# EAGLE board Microcontroller_Module_With_Power_Supply (EAGLE 9.6.2)
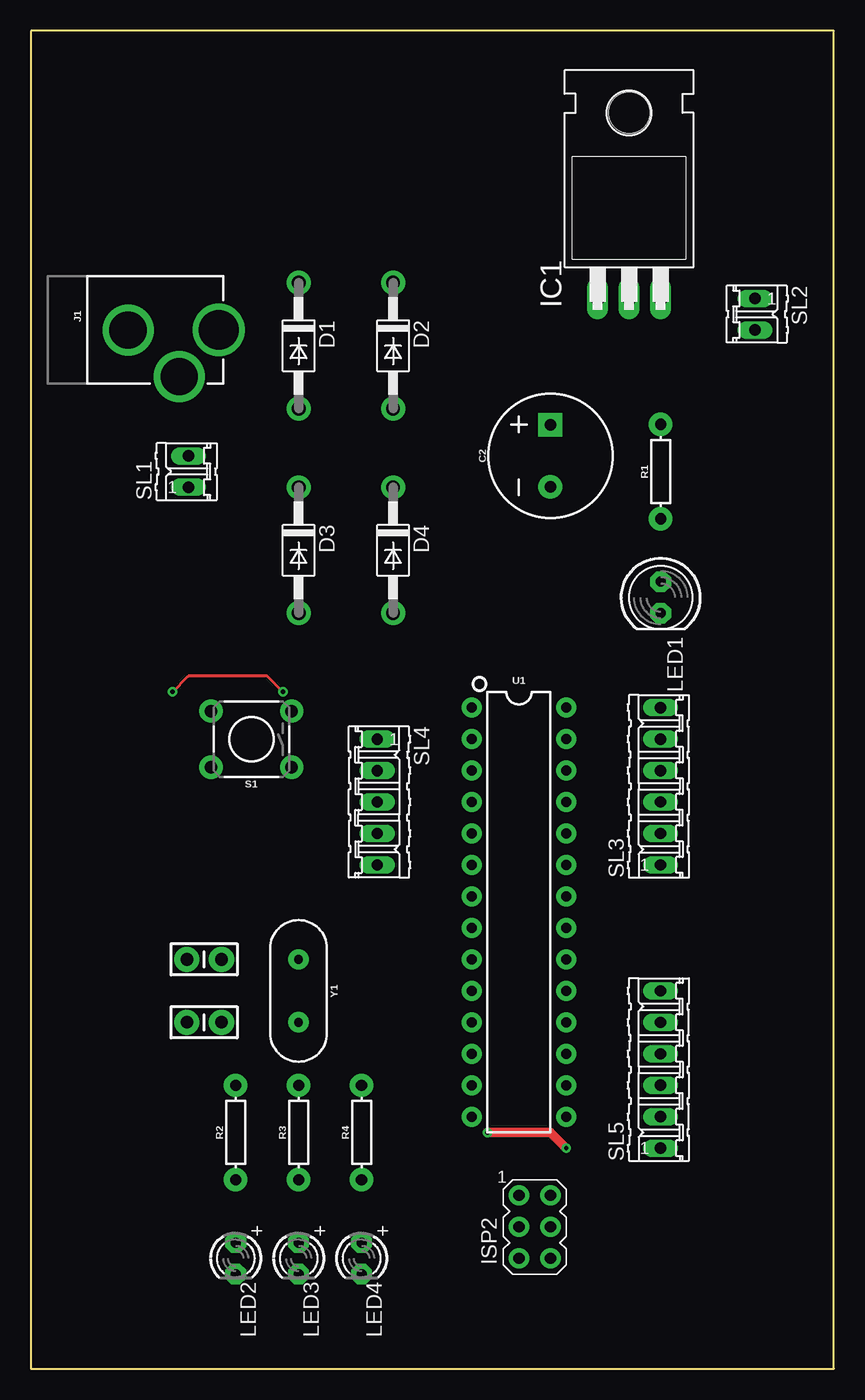
[diagram p0: board, top side]
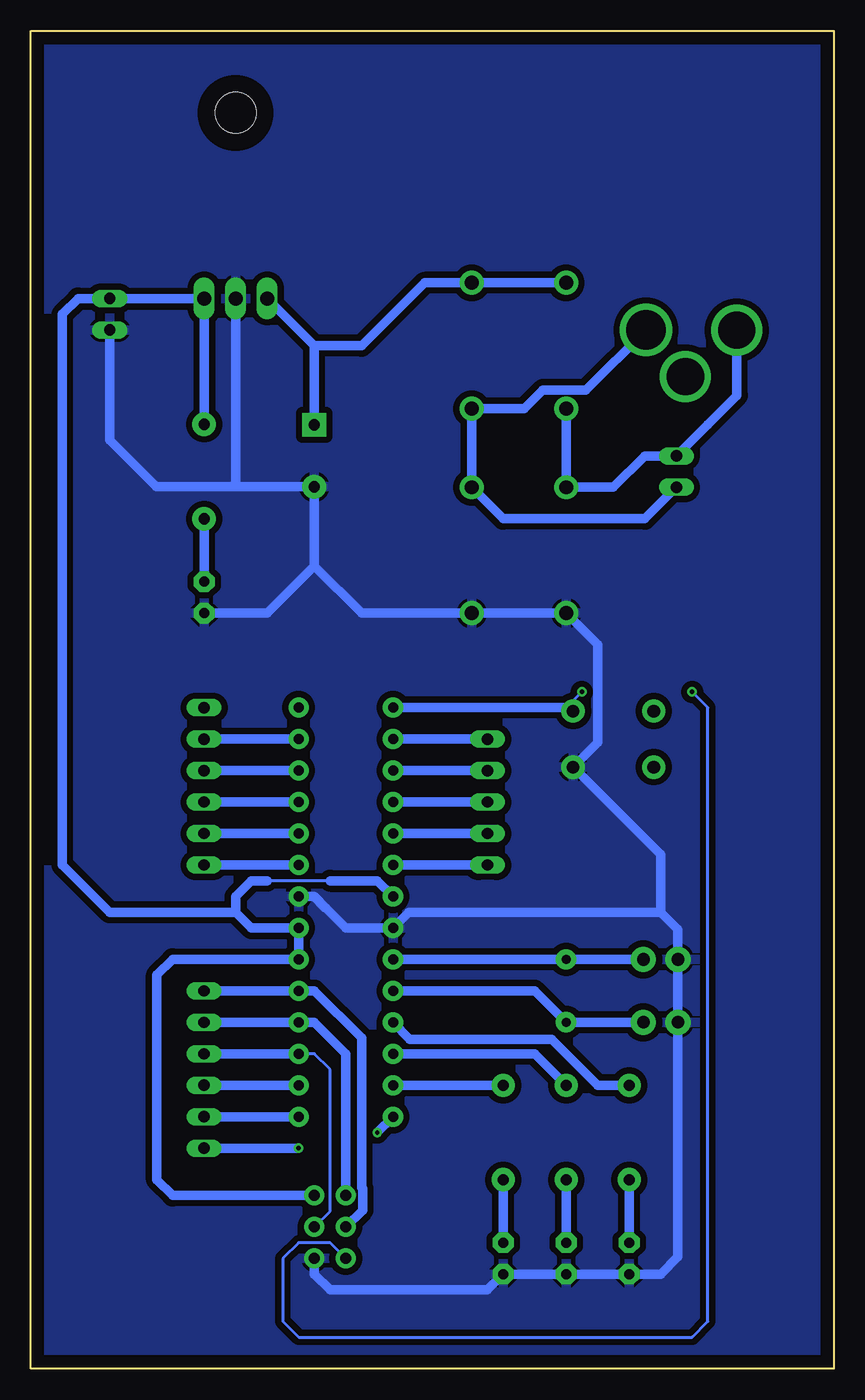
[diagram p1: board, bottom side, seen from below]

Size 64.77 x 107.95 mm. Coordinates in mm from the lower left corner, seen from the top.
Outline: 64.77,107.95 0,107.95 0,0 64.77,0 64.77,107.95
Copper layers (1*16): Top 0.035mm / dielectric 1.5mm / Bottom 0.035mm
Design rules "default": minimum track width 6mil, minimum drill 0.35mm, track to track 6mil, track to pad 6mil, pad to pad 6mil, via to via 6mil, smd to smd 6mil, copper to edge 40mil, drill to drill 6mil, minimum pad ring 10mil, minimum via ring 8mil, stop-mask expansion 4mil, vias tented up to drill 0mil, thermal gap 10mil

## Footprints (pad centres in the part's own frame; a part is rotated, then mirrored left to right if it is on the bottom)
CAP-PTH-SMALL-KIT = drill 1.016 pad 2.032: 1 -1.397,0; 2 1.397,0
CPOL-RADIAL-5MM-10MM = drill 0.9 pad 1.93 square: + 2.5,0 | drill 0.9 pad 1.93: - -2.5,0
DO41-10 = drill 1.118 pad 1.93: A 5.08,0; C -5.08,0
TO220H = drill 1.118 long: 1 -2.54,-10.16; 2 0,-10.16; 3 2.54,-10.16 | hole 3.302: 0,4.826
AVRISP = drill 0.9 pad 1.626: 1 -1.27,2.54; 2 1.27,2.54; 3 -1.27,0; 4 1.27,0; 5 -1.27,-2.54; 6 1.27,-2.54
POWER_JACK_PTH_LOCK = drill 2.997 pad 4.115: GND 0.025,6.557; GNDBREAK 3.762,10.7 | drill 3.2 pad 4.115: PWR 0,13.878
LED5MM = drill 0.813 pad 1.676 octagon: A -1.27,0; K 1.27,0
LED3MM = drill 0.813 pad 1.676 octagon: A -1.27,0; K 1.27,0
AXIAL-0.3 = drill 0.9 pad 1.88: P$1 -3.81,0; P$2 3.81,0
TACTILE_SWITCH_PTH_6.0MM = drill 1.016 pad 1.88: 1 -3.251,2.261; 2 3.251,2.261; 3 -3.251,-2.261; 4 3.251,-2.261
02P = drill 0.914 long: 1 -1.27,0; 2 1.27,0
06P = drill 0.914 long: 1 -6.35,0; 2 -3.81,0; 3 -1.27,0; 4 1.27,0; 5 3.81,0; 6 6.35,0
05P = drill 0.914 long: 1 -5.08,0; 2 -2.54,0; 3 0,0; 4 2.54,0; 5 5.08,0
DIP28 = drill 0.813 pad 1.626: 1 -16.51,-3.81; 2 -13.97,-3.81; 3 -11.43,-3.81; 4 -8.89,-3.81; 5 -6.35,-3.81; 6 -3.81,-3.81; 7 -1.27,-3.81; 8 1.27,-3.81; 9 3.81,-3.81; 10 6.35,-3.81; 11 8.89,-3.81; 12 11.43,-3.81; 13 13.97,-3.81; 14 16.51,-3.81; 15 16.51,3.81; 16 13.97,3.81; 17 11.43,3.81; 18 8.89,3.81; 19 6.35,3.81; 20 3.81,3.81; 21 1.27,3.81; 22 -1.27,3.81; 23 -3.81,3.81; 24 -6.35,3.81; 25 -8.89,3.81; 26 -11.43,3.81; 27 -13.97,3.81; 28 -16.51,3.81
HC49US = drill 0.7 pad 1.651: 1 -2.54,0; 2 2.54,0

## Placement (x,y rotation side)
C1  0.1uF  [CAP-PTH-SMALL-KIT]  13.97,33.02 180 top
C2  1mF  [CPOL-RADIAL-5MM-10MM]  41.91,73.66 90 top
C3  0.1uF  [CAP-PTH-SMALL-KIT]  13.97,27.94 180 top
D1  1N4004  [DO41-10]  21.59,82.55 270 top
D2  1N4004  [DO41-10]  29.21,82.55 270 top
D3  1N4004  [DO41-10]  21.59,66.04 270 top
D4  1N4004  [DO41-10]  29.21,66.04 270 top
IC1  7805T  [TO220H]  48.26,96.52 0 top
ISP2  AVRISP-6  [AVRISP]  40.64,11.43 0 top
J1  POWER_JACKPTH_LOCK  [POWER_JACK_PTH_LOCK]  1.27,83.82 270 top
LED1  [LED5MM]  50.8,62.23 270 top
LED2  [LED3MM]  16.51,8.89 270 top
LED3  [LED3MM]  21.59,8.89 270 top
LED4  [LED3MM]  26.67,8.89 270 top
R1  [AXIAL-0.3]  50.8,72.39 90 top
R2  [AXIAL-0.3]  16.51,19.05 90 top
R3  [AXIAL-0.3]  21.59,19.05 90 top
R4  [AXIAL-0.3]  26.67,19.05 90 top
S1  MOMENTARY-SWITCH-SPST-PTH-6.0MM  [TACTILE_SWITCH_PTH_6.0MM]  17.78,50.8 180 top
SL1  [02P]  12.7,72.39 90 top
SL2  [02P]  58.42,85.09 270 top
SL3  [06P]  50.8,46.99 90 top
SL4  [05P]  27.94,45.72 270 top
SL5  [06P]  50.8,24.13 90 top
U1  328P  [DIP28]  39.37,36.83 270 top
Y1  [HC49US]  21.59,30.48 270 top

## Library data of the parts
C1 C3 = SparkFun-Capacitors; PROD_ID: CAP-08370
C2 = SparkFun-Capacitors; PROD_ID: CAP-09538
D1-D4 IC1 ISP2 LED1-LED4 = adafruit
J1 = SparkFun-Connectors; PROD_ID: CONN-08197; SF_ID: PRT-00119
R1-R4 = SparkFun-Resistors
S1 = SparkFun-Switches; PROD_ID: SWCH-08441; SF_SKU: COM-00097
SL1-SL5 = con-amp-quick; OC_FARNELL: unknown; OC_NEWARK: unknown
U1 = SparkFun-IC-Microcontroller; PROD_ID: IC-09136
Y1 = SparkFun-Clocks

## Nets
GND: C1.2 C2.- C3.2 D3.A D4.A IC1.2 ISP2.6 LED1.K LED2.K LED3.K LED4.K S1.1 SL2.2 U1.8 U1.22
LED1: R2.P$2 U1.11
LED2: R3.P$2 U1.12
LED3: R4.P$2 U1.13
MISO: ISP2.1 SL5.5 U1.18
MOSI: ISP2.4 SL5.4 U1.17
N$1: D1.A D3.C J1.GND SL1.2
N$2: D2.A D4.C J1.PWR SL1.1
N$3: C2.+ D1.C D2.C IC1.1
N$5: LED4.A R4.P$1
N$6: LED1.A R1.P$1
N$7: LED3.A R3.P$1
N$8: LED2.A R2.P$1
N$9: SL3.1 U1.23
N$10: SL3.2 U1.24
N$11: SL3.3 U1.25
N$12: SL3.4 U1.26
N$13: SL3.5 U1.27
N$14: SL4.1 U1.2
N$15: SL4.2 U1.3
N$16: SL4.3 U1.4
N$17: SL4.4 U1.5
N$18: SL4.5 U1.6
N$19: SL5.1 U1.14
N$20: SL5.2 U1.15
N$21: SL5.3 U1.16
RST: ISP2.5 S1.3 U1.1
SCK: ISP2.3 SL5.6 U1.19
VCC: IC1.3 ISP2.2 R1.P$2 SL2.1 U1.7 U1.20 U1.21
XT1: C1.1 U1.9 Y1.1
XT2: C3.1 U1.10 Y1.2

## Tracks (layer width: path | path; a pad name or v marks a point on that pad's centre or on a via)
GND
  Bottom 0.762: 48.26,71.16 C2.- 41.91,64.77 | 48.26,71.16 54.65,71.16 58.42,74.93 SL2.2 | IC1.2 48.26,71.16 | LED1.K 45.72,60.96 41.91,64.77 | 41.91,64.77 38.1,60.96 D4.A D3.A 19.05,58.42 19.05,50.52 S1.1 13.97,41.48 13.97,36.83 | ISP2.6 41.91,7.62 40.64,6.35 27.94,6.35 LED4.K LED3.K LED2.K 13.97,7.62 12.57,9.02 C3.2 C1.2 12.57,35.43 13.97,36.83 | U1.22 41.93,38.1 41.02,37.19 41,37.19 39.37,35.56 U1.8 34.29,36.83 13.97,36.83
  pour Bottom (isolate 0.508): 0,0 64.77,0 64.77,107.95 0,107.95
LED1
  Bottom 0.762: R2.P$2 19.05,22.86 22.77,26.58 34.2,26.58 U1.11
LED2
  Bottom 0.762: R3.P$2 24.13,25.4 U1.12
LED3
  Bottom 0.762: R4.P$2 U1.13
MISO
  Bottom 0.762: ISP2.1 39.37,25.4 41.91,27.94 U1.18 SL5.5
MOSI
  Bottom 0.254: ISP2.4 40.64,12.7 40.64,24.13 41.91,25.4 U1.17
  Bottom 0.762: U1.17 SL5.4
N$1
  Bottom 0.762: D1.A D3.C 17.78,71.12 15.24,73.66 SL1.2 10.16,76.2 7.83,78.53 J1.GND
N$2
  Bottom 0.762: SL1.1 15.24,68.58 26.67,68.58 D4.C D2.A 24.98,77.47 23.48,78.97 20,78.97 J1.PWR
N$3
  Bottom 0.762: C2.+ 41.91,82.55 | 41.91,82.55 IC1.1 | D1.C D2.C 33.02,87.63 38.1,82.55 41.91,82.55
N$5
  Bottom 0.762: LED4.A R4.P$1
N$6
  Bottom 0.762: LED1.A R1.P$1
N$7
  Bottom 0.762: LED3.A R3.P$1
N$8
  Bottom 0.762: LED2.A R2.P$1
N$9
  Bottom 0.762: U1.23 SL3.1
N$10
  Bottom 0.762: U1.24 SL3.2
N$11
  Bottom 0.762: U1.25 SL3.3
N$12
  Bottom 0.762: U1.26 SL3.4
N$13
  Bottom 0.762: U1.27 SL3.5
N$14
  Bottom 0.762: SL4.1 U1.2
N$15
  Bottom 0.762: SL4.2 U1.3
N$16
  Bottom 0.762: SL4.3 U1.4
N$17
  Bottom 0.762: SL4.4 U1.5
N$18
  Bottom 0.762: SL4.5 U1.6
N$19  (via drill 0.35)
  Top 0.762: v36.83,19.05 41.91,19.05 v43.18,17.78
  Bottom 0.762: U1.14 v36.83,19.05 | v43.18,17.78 SL5.1
N$20
  Bottom 0.762: U1.15 SL5.2
N$21
  Bottom 0.762: U1.16 SL5.3
RST  (via drill 0.35)
  Top 0.254: v20.32,54.61 19.05,55.88 12.7,55.88 v11.43,54.61
  Bottom 0.254: ISP2.5 40.64,10.16 43.18,10.16 44.45,8.89 44.45,3.81 43.18,2.54 11.43,2.54 10.16,3.81 10.16,53.34 v11.43,54.61 | v20.32,54.61 21.03,53.9 S1.3
  Bottom 0.762: S1.3 21.31,53.34 U1.1
SCK
  Bottom 0.762: SL5.6 U1.19 41.91,30.48 38.1,26.67 38.1,14.6 38.02,14.53 38.02,12.78 ISP2.3
VCC
  Bottom 0.254: 40.64,39.37 45.72,39.37
  Bottom 0.762: R1.P$2 IC1.3 SL2.1 60.96,86.36 62.23,85.09 62.23,40.64 58.42,36.83 48.26,36.83 | ISP2.2 53.34,13.97 54.61,15.24 54.61,31.75 53.34,33.02 U1.20 U1.21 46.99,35.56 48.26,36.83 | 40.64,39.37 36.83,39.37 U1.7 | 45.72,39.37 46.99,39.37 48.26,38.1 48.26,36.83
XT1
  Bottom 0.762: U1.9 Y1.1 C1.1
XT2
  Bottom 0.762: U1.10 24.13,30.48 Y1.2 C3.1